# Allegro board Templet_16xB.brd
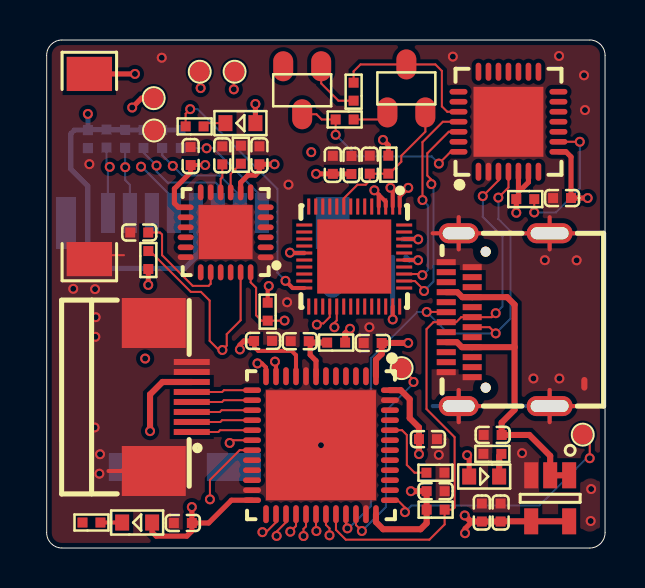
[diagram p0: board, top side]
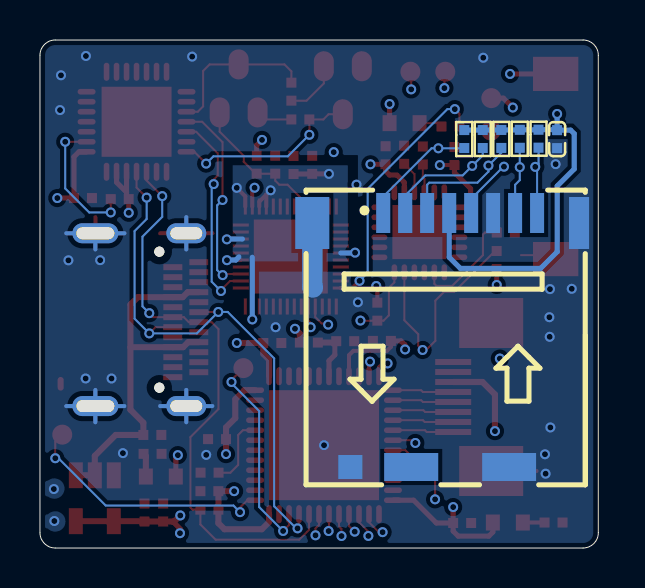
[diagram p1: board, bottom side, seen from below]

Outline 27.94 x 25.4 mm; copper layers: TOP, 3V3, GND, BOTTOM. Coordinates in mm from the lower left corner of the outline.
Outline path: 0,24.64 0,0.76 arc(0.22,0.22) 0.76,0 27.18,0 arc(27.72,0.22) 27.94,0.76 27.94,24.64 arc(27.72,25.18) 27.18,25.4 0.76,25.4 arc(0.22,25.18) 0,24.64

## Placement (name value [footprint] x y rotation side)
C1  0.1uf  [C0402]  21.77 1.77 90 top
C2  0.1uf  [C0402]  22.32 5.65 180 top
C3  10uf  [C0402]  22.71 1.77 90 top
C4  1uF  [C0402]  14.32 19.16 90 top
C5  0.1uf  [C0402]  15.25 19.15 90 top
C6  0.1uf  [C0402]  25.79 17.5 0 top
C7  0.1uf  [C0402]  16.17 19.17 90 top
C8  0.1uf  [C0402]  19.46 2.84 0 top
C9  0.1uf  [C0402]  10.83 10.35 0 top
C10  0.1uf  [C0402]  6.81 1.25 180 top
C11  0.1uf  [C0402]  16.31 10.25 180 top
C12  0.1uf  [C0402]  19.08 5.44 0 top
C13  2.2uF  [C0402]  4.63 15.77 0 top
C14  0.1uf  [C0402]  10.64 19.64 90 top
C15  0.1uf  [C0402]  12.66 10.34 180 top
C16  10nF  [C0402]  7.2 19.6 90 top
C17  0.1uf  [C0402]  8.79 19.63 90 top
C18  0.1uf  [C0402]  2.06 20.44 90 bottom
D1  LED  [LED0603]  9.69 21.24 180 top
D2  LED  [LED0603]  4.53 1.27 180 top
D3  LED  [LED0603]  21.89 3.57 0 top
J1  ANT  [ANT-SMD_L9_5-W2_1]  2.14 19.07 270 top
J2  HEADER 10  [FPC-SMD_KH-FG0_5-H2_0-8PIN]  6.31 7.55 90 top
J3  HEADER 1  [TPC_1R00]  9.4 23.81 0 top
J4  HEADER 1  [TPC_1R00]  7.66 23.81 0 top
J5  HEADER 1  [TPC_1R00]  26.82 5.67 0 top
J6  HEADER 1  [TPC_1R00]  17.76 8.99 0 top
J7  HEADER 1  [TPC_1R00]  5.36 22.49 0 top
J8  HEADER 1  [TPC_1R00]  5.37 20.87 0 top
Q1  NPN BCE  [SOT23_3L]  18 22.98 0 top
Q2  NPN BCE  [SOT23_3L]  12.79 22.89 180 top
R1  10K  [R0402]  17.1 19.17 270 top
R2  10K  [R0402]  23.95 17.44 0 top
R3  10K  [R0402]  14.91 21.43 0 top
R4  200R  [R0402]  7.4 21.08 180 top
R5  10K  [R0402]  15.36 22.82 270 top
R6  200R  [R0402]  2.24 1.27 180 top
R7  200R  [R0402]  22.3 4.71 180 top
R8  10K  [R0402]  19.45 3.76 0 top
R9  4.7K  [R0402]  5.09 14.4 90 top
R10  4.7K  [R0402]  11.06 11.82 270 top
R11  4.7K  [R0402]  19.46 1.92 180 top
R12  10K  [R0402]  14.48 10.27 180 top
R13  4.7K  [R0402]  9.72 19.66 90 top
R14  4.7K  [R0402]  6.71 20.45 90 bottom
R15  4.7K  [R0402]  5.78 20.45 90 bottom
R16  4.7K  [R0402]  4.85 20.45 90 bottom
R17  4.7K  [R0402]  3.93 20.46 90 bottom
R18  4.7K  [R0402]  2.99 20.47 90 bottom
U1  -  [SOT23-5]  25.2 2.48 180 top
U2  type-c-24p  [USB-C-SMD_TYPE-C-24P-QT]  22.58 11.42 90 top
U3  cp2102  [QFN-28_L5_0-W5_0-P0_50-BL-EP]  23.11 21.31 0 top
U4  ESP32-DOWD  [QFN-48_L5_0-W5_0-P0_35-BL-EP3_7]  15.39 14.57 180 top
U5  STM32F411xD/Exx UFQFPN48  [UFQFPN-48_L7_0-W7_0-P0_50-BL-EP]  13.73 5.14 180 top
U6  MPU6050  [QFN-24_L4_0-W4_0-P0_50-BL-EP2_7]  8.96 15.78 90 top
U7  TF/MicroSD  [TF-SMD_DM3CS-SF]  7.64 10.4 0 bottom

## Library data of the parts
C1-C12 = CAP NP: signal model: CAP_0402_1.01UF_16V_C0402_100NF_100nF
C13-C18 = CAP NP
D1-D3 = LED
J1 = HEADER 2
J2 = HEADER 10
J3-J8 = HEADER 1
Q1 Q2 = NPN BCE
R1-R18 = R
U1 = SOT23-5
U2 = type-c-24p
U3 = cp2102
U4 = ESP32-DOWD
U5 = STM32F401xD/Exx UFQFPN48
U6 = MPU6050
U7 = TF/MicroSD

## Footprints (pads in the part's own frame, mm; a bottom-side part is the same pattern mirrored in y, then rotated)
ANT-SMD_L9_5-W2_1
  rect 1.71x2.268 smd: 1(-4.63,0) 2(4.63,0)
C0402
  rect 0.5x0.5 smd: 1(-0.45,0) 2(0.45,0)
FPC-SMD_KH-FG0_5-H2_0-8PIN
  rect 0.3x1.8 smd: 1(-1.75,-0.95) 2(-1.25,-0.95) 3(-0.75,-0.95) 4(-0.25,-0.95) 5(0.25,-0.95) 6(0.75,-0.95) 7(1.25,-0.95) 8(1.75,-0.95)
  rect 2.5x3.2 smd: 9(3.7,0.95) 10(-3.7,0.95)
LED0603
  rect 0.7x0.8 smd: 1(-0.75,0) 2(0.75,0)
QFN-24_L4_0-W4_0-P0_50-BL-EP2_7
  oval 0.28x0.8 smd: 1(-1.25,-2) 2(-0.75,-2) 3(-0.25,-2) 4(0.25,-2) 5(0.75,-2) 6(1.25,-2) 13(1.25,2) 14(0.75,2) 15(0.25,2) 16(-0.25,2) 17(-0.75,2) 18(-1.242,2)
  oval 0.8x0.28 smd: 7(2,-1.25) 8(2,-0.75) 9(2,-0.25) 10(2,0.25) 11(2,0.75) 12(2,1.25) 19(-2,1.25) 20(-2,0.75) 21(-2,0.25) 22(-2,-0.25) 23(-2,-0.75) 24(-2,-1.25)
  rect 2.7x2.7 smd: 25(0.012,0)
QFN-28_L5_0-W5_0-P0_50-BL-EP
  oval 0.28x0.9 smd: 1(-1.501,-2.5) 2(-1.001,-2.5) 3(-0.5,-2.5) 4(0,-2.5) 5(0.5,-2.5) 6(1.001,-2.5) 7(1.501,-2.5) 15(1.501,2.5) 16(1.001,2.5) 17(0.5,2.5) 18(0,2.5) 19(-0.5,2.5) 20(-1.001,2.5) 21(-1.501,2.5)
  oval 0.9x0.28 smd: 8(2.5,-1.501) 9(2.5,-1.001) 10(2.5,-0.5) 11(2.5,0) 12(2.5,0.5) 13(2.5,1.001) 14(2.5,1.501) 22(-2.5,1.501) 23(-2.5,1.001) 24(-2.5,0.5) 25(-2.5,0) 26(-2.5,-0.5) 27(-2.5,-1.001) 28(-2.5,-1.501)
  rect 3.5x3.5 smd: 29(0,0)
QFN-48_L5_0-W5_0-P0_35-BL-EP3_7
  rect 0.15x0.8 smd: 1(-2.275,-2.5) 2(-1.925,-2.5) 3(-1.575,-2.5) 4(-1.225,-2.5) 5(-0.875,-2.5) 6(-0.525,-2.5) 7(-0.175,-2.5) 8(0.175,-2.5) 9(0.525,-2.5) 10(0.875,-2.5) 11(1.225,-2.5) 12(1.575,-2.5) 13(1.925,-2.5) 14(2.275,-2.5) 25(2.275,2.5) 26(1.925,2.5) 27(1.575,2.5) 28(1.225,2.5) 29(0.875,2.5) 30(0.525,2.5) 31(0.175,2.5) 32(-0.175,2.5) 33(-0.525,2.5) 34(-0.875,2.5) 35(-1.225,2.5) 36(-1.575,2.5) 37(-1.925,2.5) 38(-2.275,2.5)
  rect 0.8x0.15 smd: 15(2.5,-1.575) 16(2.5,-1.225) 17(2.5,-0.875) 18(2.5,-0.525) 19(2.5,-0.175) 20(2.5,0.175) 21(2.5,0.525) 22(2.5,0.875) 23(2.5,1.225) 24(2.5,1.575) 39(-2.5,1.575) 40(-2.5,1.225) 41(-2.5,0.875) 42(-2.5,0.525) 43(-2.5,0.175) 44(-2.5,-0.175) 45(-2.5,-0.525) 46(-2.5,-0.875) 47(-2.5,-1.225) 48(-2.5,-1.575)
  rect 3.7x3.7 smd: 49(0,0)
R0402
  rect 0.5x0.5 smd: 1(-0.45,0) 2(0.45,0)
SOT23-5
  rect 0.7x1.3 smd: 1(-0.95,-1.15) 2(0,-1.15) 3(0.95,-1.15) 4(0.95,1.15) 5(-0.95,1.15)
SOT23_3L
  oval 1x1.5 smd: 1(-0.95,-1.2) 2(0.95,-1.2) 3(0,1.2)
TF-SMD_DM3CS-SF
  rect 0.7x2 smd: 1(3.125,-6.35) 2(2.025,-6.35) 3(0.925,-6.35) 4(-0.177,-6.35) 5(-1.275,-6.35) 6(-2.375,-6.35) 7(-3.475,-6.35) 8(-4.575,-6.35)
  rect 2.7x1.4 smd: 9(1.724,6.35) 12(-3.176,6.35)
  rect 1.7x2.6 smd: 10(6.675,-5.851)
  rect 1x2.6 smd: 11(-6.675,-5.851)
  rect 1.2x1.2 smd: 13(4.775,6.35)
TPC_1R00
  round 1 smd: 1(0,0)
UFQFPN-48_L7_0-W7_0-P0_50-BL-EP
  oval 0.28x0.9 smd: 1(-2.751,-3.449) 2(-2.25,-3.449) 3(-1.75,-3.449) 4(-1.249,-3.449) 5(-0.749,-3.449) 6(-0.249,-3.449) 7(0.249,-3.449) 8(0.75,-3.449) 9(1.25,-3.449) 10(1.75,-3.449) 11(2.251,-3.449) 12(2.751,-3.449) 25(2.751,3.449) 26(2.251,3.449) 27(1.75,3.449) 28(1.25,3.449) 29(0.75,3.449) 30(0.249,3.449) 31(-0.249,3.449) 32(-0.749,3.449) 33(-1.249,3.449) 34(-1.75,3.449) 35(-2.25,3.449) 36(-2.751,3.449)
  oval 0.9x0.28 smd: 13(3.45,-2.751) 14(3.45,-2.25) 15(3.45,-1.75) 16(3.45,-1.25) 17(3.45,-0.749) 18(3.45,-0.249) 19(3.45,0.249) 20(3.45,0.749) 21(3.45,1.25) 22(3.45,1.75) 23(3.45,2.25) 24(3.45,2.751) 37(-3.449,2.751) 38(-3.449,2.25) 39(-3.449,1.75) 40(-3.449,1.25) 41(-3.449,0.749) 42(-3.449,0.249) 43(-3.449,-0.249) 44(-3.449,-0.749) 45(-3.449,-1.25) 46(-3.449,-1.75) 47(-3.449,-2.25) 48(-3.449,-2.751)
  rect 5.5x5.5 smd: 49(0,0)
USB-C-SMD_TYPE-C-24P-QT
  round 0.5 hole 0.5: (-3.4,0.613) (3.4,0.613)
  oval 1x2 hole 0.6x1.6: 1(-4.32,1.962) 2(4.32,1.962)
  oval 1x2.3 hole 0.6x1.9: 3(4.32,-2.587) 4(-4.32,-2.587)
  rect 0.3x0.95 smd: A1(-2.625,2.587) A2(-2.125,2.587) A3(-1.625,2.587) A4(-1.125,2.587) A5(-0.625,2.587) A6(-0.125,2.587) A7(0.375,2.587) A8(0.875,2.587) A9(1.375,2.587) A10(1.875,2.587) A11(2.375,2.587) A12(2.875,2.587) B1(2.625,1.288) B2(2.125,1.288) B3(1.625,1.288) B4(1.125,1.288) B5(0.625,1.288) B6(0.125,1.288) B7(-0.375,1.288) B8(-0.875,1.288) B9(-1.375,1.288) B10(-1.875,1.288) B11(-2.375,1.288) B12(-2.875,1.288)

## Nets
3V3: C1.1 C3.1 C4.1 C5.1 C6.2 C8.1 C9.1 C10.1 C11.1 C12.1 C14.1 C16.1 C18.2 D1.1(+) D2.1(+) D3.1(+) J2.6 J7.1 R1.1 R2.1 R9.1 R10.1 R11.2 R12.1 R14.2 R15.2 R16.2 R17.2 R18.2 U1.4(OUT) U1.5(FB) U3.5(D-) U3.6(VDD) U3.8(VBUS) U4.1(VDDA#1) U4.3(VDD3P3#3) U4.4(VDD3P3#4) U4.19(VDD3P3_RTC) U4.37(VDD3P3_CPU) U4.43(VDDA#43) U4.46(VDDA#46) U5.1(VBAT) U5.9(VDDA/VREF+) U5.24(VDD#24) U5.36(VDD#36) U5.48(VDD#48) U6.8(VLOGIC) U6.13(VDD) U7.4(VDD)
GND: C1.2 C2.2 C3.2 C4.2 C5.2 C6.1 C7.2 C8.2 C9.2 C10.2 C11.2 C12.2 C13.1 C14.2 C15.2 C16.2 C17.2 C18.1 J1.2 J2.7 J2.8 J2.9 J2.10 J8.1 R7.2 R8.2 R13.2 U1.3(GND) U2.1(EP#1) U2.2(EP#2) U2.3(EP#3) U2.4(EP#4) U2.A1(GND#A1) U2.A12(GND#A12) U2.B1(GND#B1) U2.B12(GND#B12) U3.2(RI) U3.29(HEAT_TAB) U5.8(VSSA/VREF-) U5.23(VSS#23) U5.35(VSS#35) U5.47(VSS#47) U5.49(GND) U6.1(CLKIN) U6.11(FSYNC) U6.18(GND#18) U6.25(GND#25) U7.6(VSS) U7.10 U7.11 U7.12 U7.13
VDD_5V: C2.1 U1.1(IN) U1.2(EN) U2.A4(VBUS#A4) U2.A9(VBUS#A9) U2.B4(VBUS#B4) U2.B9(VBUS#B9)
BLK: J2.1 U5.17(PA7)
CC1: U2.A5(CC1)
CC2: U2.B5(CC2)
DC: J2.2 U5.16(PA6)
DTR: Q2.3(E) R3.1 U3.28(DTR)
E32_IO4: R4.2 U4.24(GPIO4)
E32_U0RXD: U3.26(TXD) U4.40(U0RXD)
E32_U0TXD: U3.25(RXD) U4.41(U0TXD)
E32_U1RXD: J4.1 U4.28(SD_DATA_2) U5.12(PA2)
E32_U1TXD: J3.1 U4.29(SD_DATA_3) U5.11(PA1)
EN: C7.1 Q1.2(C) R1.2 U4.9(CHIP_PU)
GPIO0: Q2.2(C)
MPU_SCL: R9.2 U5.19(PB1) U6.23(SCL)
MPU_SDA: R10.2 U5.18(PB0) U6.24(SDA)
RES: J2.3 U5.15(PA5)
RESV1: U6.22(RESV1)
RESV2: U6.21(RESV2)
RESV3: U6.19(RESV3)
RTS: Q1.3(E) R5.1 U3.24(RTS)
RX1+: U2.B11(RX1+)
RX1-: U2.B10(RX1-)
RX2+: U2.A11(RX2+)
RX2-: U2.A10(RX2-)
SCL: J2.5 U5.13(PA3)
SDA: J2.4 U5.14(PA4)
SDIO_CLK: U5.28(PB15) U7.5(CLK)
SDIO_CMD: R16.1 U5.29(PA8) U7.3(CMD)
SDIO_D0: R17.1 U5.27(PB14) U7.7(DATA0)
SDIO_D1: R18.1 U5.26(PB13) U7.8(DATA1)
SDIO_D2: R14.1 U5.31(PA10) U7.1(DAT2)
SDIO_D3: R15.1 U5.30(PA9) U7.2(DATA3/CD)
ST_PA14: R6.2
ST_SWCLK: J5.1 U5.37(PA14)
ST_SWDIO: J6.1 U5.34(PA13)
SUB1: U2.A8(SUB1)
SUB2: U2.B8(SUB2)
TX1+: U2.A2(TX1+)
TX1-: U2.A3(TX1-)
TX2+: U2.B2(TX2+)
TX2-: U2.B3(TX2-)
USB-D+: U2.A7(D-#A7) U2.B7(D-#B7) U3.4(D+) U5.33(PA12)
USB-D-: R11.1 U2.A6(D+#A6) U2.B6(D+#B6) U3.3(GND) U5.32(PA11)
N05093: R2.2 U3.9(RST)
N06006: J1.1 U4.2(LAN_IN)
N16435: Q1.1(B) R3.2
N16447: Q2.1(B) R5.2
N22150: C15.1 R12.2 U5.7(NRST)
N26946: C13.2 U6.20(CPOUT)
N28132: C17.1 U6.10(REGOUT)
N29778: R13.1 U6.9(AD0)
N53835: D1.2(-) R4.1
N53839: D2.2(-) R6.1
N53846: D3.2(-) R7.1
N101946: R8.1 U5.44(BOOT0)

Pads without a net: U3 1 7 10 11 12 13 14 15 16 17 18 19 20 21 22 23 27; U4 5 6 7 8 10 11 12 13 14 15 16 17 18 20 21 22 23 25 26 27 30 31 32 33 34 35 36 38 39 42 44 45 47 48 49; U5 2 3 4 5 6 10 20 21 22 25 38 39 40 41 42 43 45 46; U6 2 3 4 5 6 7 12 14 15 16 17; U7 9

## Via types
v1: diameter 0.5, hole 0.3, TOP to BOTTOM, 98 vias

## Routing (per net, layer and track width the routed paths; a pad name or vN(x,y) marks a point on that pad's centre or on a via; arc(x,y) is an arc through that point)
3V3: length 88.5
  TOP w0.203: U4.1 17.67,17.58 v1(18.09,18.01) ; 16.62,17.67 v1(16.4,17.88) ; 16.62,17.67 U4.4 ; 16.62,17.67 16.97,17.32 U4.3 ; C9.1 10.38,10.06 10.58,9.86 12.26,9.86 12.48,9.64 U5.9 ; R10.1 11.06,13.05 v1(11.11,13.1) ; U4.19 12.19,14.75 v1(12.17,14.77) ; C16.1 v1(7.93,19.15) ; v1(18.58,14.39) 18.58,14.4 U4.43 ; U4.46 18.57,15.45 v1(18.59,15.43) ; U4.37 v1(17.32,11.43)
  TOP w0.254: 23.61,17.79 U3.5 ; 23.61,17.79 23.61,17.55 R2.1 v1(23.5,16.76) ; 23.61,17.79 24.11,18.29 U3.6 ; v1(11.4,19.19) C14.1 10.64,18.85 10.44,18.64 10.08,18.64 9.71,18.27 U6.8 ; D2.1 5.28,0.8 5.48,0.59 7.01,0.59 7.26,0.84 C10.1 ; v1(21.04,4.64) 21.14,4.54 D3.1 ; D1.1 v1(10.44,22.2) ; C10.1 8.11,1.25 9.24,2.39 U5.24 ; C10.1 v1(7.26,2.05) ; v1(27.07,17.5) C6.2 26.24,19.56 25.98,19.81 U3.8 ; 21.29,1.32 20.93,0.97 v1(20.93,0.74) ; v1(9.67,9.93) 9.67,10.15 9.87,10.35 C9.1 ; C16.1 7.2,18.78 6.39,17.97 6.39,17.24 6.59,17.03 U6.13 ; J7.1 4.75,22.49 v1(4.28,22.02) ; v1(16.83,20.41) 17.1,20.14 R1.1 ; v1(13.48,18.71) C4.1 14.33,18.7 C5.1 ; R9.1 5.09,13.16 v1(5.08,13.15)
  TOP w0.305: U5.1 16.48,9.42 16.76,9.71 C11.1 v1(18.09,10.25) ; v1(5.17,5.84) 5.17,7.68 5.8,8.3 J2.6 ; v1(18.63,4.69) C12.1 18.63,6.03 18.17,6.49 18.17,7.44 17.71,7.89 U5.48 ; v1(15.18,10.96) 14.93,10.72 R12.1 ; U5.36 16.48,1.3 16.84,0.94 18.71,0.94 19.01,1.24 R11.2 19.01,1.92 C8.1 v1(18.22,2.84) ; U1.5 U1.4 22.73,1.33 C3.1 C1.1 21.22,1.32 v1(20.92,1.63)
  BOTTOM w0.203: 17.31,14.54 17.32,14.54 ; 17.8,15.44 17.81,15.45 ; 12.89,14.75 12.88,14.75
  BOTTOM w0.254: R14.2 5.79,20.9 R15.2 4.86,20.9 R16.2 3.94,20.9 R17.2 3,20.91 R18.2 2.08,20.92 C18.2 ; 12.88,14.75 12.19,14.75 v1(12.17,14.77) ; v1(18.58,14.39) 18.58,14.4 18.14,14.4 17.98,14.56 ; C18.2 1.39,20.89 1.21,20.71 1.21,18.95 2.06,18.1 2.06,14.81 2.89,13.98 6.9,13.98 7.46,14.54 U7.4 ; C18.2 v1(2.06,21.7) ; 17.81,15.45 18.57,15.45 v1(18.59,15.43) ; 17.32,14.54 v1(17.32,11.43)
  vias: v1(4.93,9.47) v1(13.24,19.79)
GND: length 55
  TOP w0.102: 3.87,14.64 2.14,14.64 2.09,14.69
  TOP w0.203: 19.31,15.74 U2.2 ; U2.2 20.62,14.93 ; U2.2 20.62,16.54 ; U2.2 21.92,15.74 ; U2.3 25.17,16.54 ; U2.3 25.17,14.93 ; U2.3 23.71,15.74 ; U2.3 26.62,15.74 ; 20.62,6.29 U2.1 ; U2.1 20.62,7.9 ; U2.1 21.92,7.1 ; 25.17,6.29 U2.4 ; U2.4 25.17,7.9 ; U2.4 26.62,7.1 ; v1(19.62,4.66) 19.6,4.66 19.53,4.72 ; 3.09,3.85 J2.10
  TOP w0.305: 26.9,8.02 26.9,8.4
  GND w0.203: 20.62,6.29 U2.1 ; U2.1 21.92,7.1 ; U2.1 19.31,7.1 ; U2.1 20.62,7.9 ; 25.17,6.29 U2.4 ; U2.4 25.17,7.9 ; U2.4 23.71,7.1 ; U2.4 26.62,7.1 ; 19.31,15.74 U2.2 ; U2.2 20.62,14.93 ; U2.2 20.62,16.54 ; U2.2 21.92,15.74 ; U2.3 26.62,15.74 ; U2.3 25.17,16.54 ; U2.3 25.17,14.93 ; U2.3 23.71,15.74
  BOTTOM w0.203: 20.62,6.29 U2.1 ; U2.1 21.92,7.1 ; U2.1 20.62,7.9 ; U2.1 19.31,7.1 ; U2.4 25.17,7.9 ; U2.4 23.71,7.1 ; U2.4 26.62,7.1 ; U2.4 25.17,6.29 ; 20.62,14.93 U2.2 20.62,16.54 ; 25.17,14.93 U2.3 ; U2.3 26.62,15.74 ; U2.3 23.71,15.74 ; 5.26,15.86 5.26,15.87
  BOTTOM w0.254: 5.26,15.87 U7.6
  BOTTOM w1.016: 14.28,13.02 14.31,13.05 U7.10
  vias: v1(1.33,12.96) v1(2.14,19.19) v1(2.42,12.94) v1(2.45,11.54) v1(2.43,10.56) v1(2.4,6.03) v1(2.64,3.72) v1(2.67,4.69) v1(5.76,24.51) v1(12.03,12.29) v1(12.1,18.17) v1(13.73,5.14) v1(16.15,11.04) v1(20.33,24.57) v1(23.79,4.74) v1(24.36,8.48) v1(24.93,14.39) v1(25.64,24.6) v1(25.66,8.48) v1(26.52,14.38) v1(26.89,23.64) v1(26.94,21.9) v1(27.25,2.95) v1(27.22,1.35)
VDD_5V: length 18.8
  TOP w0.305: 23.41,10.04 23.41,6.91 22.77,6.27 C2.1 24.15,5.65 25.2,4.61 U1.2 U1.1 ; 23.41,10.04 U2.B9 20.77,10.04 20.52,10.29 U2.A4 ; 23.41,10.04 23.41,12.17 23.04,12.54 U2.B4 20.8,12.54 20.55,12.79 U2.A9
BLK: length 3.1
  TOP w0.102: J2.1 8.59,5.8 8.68,5.89 U5.17
DC: length 3.1
  TOP w0.102: J2.2 8.69,6.3 8.78,6.39 U5.16
DTR: length 9.5
  TOP w0.102: v1(19.63,19.22) 20.22,19.81 U3.28 ; v1(14.46,20.66) R3.1 13.76,21.43 13.5,21.69 Q2.3
  BOTTOM w0.102: v1(19.63,19.22) 19.26,19.58 15.54,19.58 v1(14.46,20.66)
E32_IO4: length 12.8
  TOP w0.102: R4.2 6.95,21.72 v1(7.18,21.94)
  TOP w0.203: v1(11.95,13.36) 12.31,13 U4.24
  BOTTOM w0.102: v1(7.18,21.94) 7.55,21.94 11.54,17.96 11.54,13.77 v1(11.95,13.36)
E32_U0RXD: length 10.4
  TOP w0.102: v1(18.88,12.85) 18.87,12.86 18.87,12.9 18.43,13.35 U4.40 ; v1(19.25,18.2) 19.25,18.42 19.05,18.62 19.05,19.74 20.12,20.81 U3.26
  BOTTOM w0.102: v1(18.88,12.85) 19.35,13.31 19.35,18.1 v1(19.25,18.2)
E32_U0TXD: length 10
  TOP w0.102: U4.41 18.72,13.7 18.77,13.64 v1(18.8,13.64) ; U3.25 19.82,21.31 18.81,20.29 v1(18.81,17.4)
  BOTTOM w0.102: v1(18.8,13.64) 18.82,13.64 19.07,13.9 19.07,17.13 v1(18.81,17.4)
E32_U1RXD: length 21.2
  TOP w0.102: J4.1 7.7,23.77 v1(7.7,23) ; v1(13.52,11.17) 13.58,11.23 13.85,11.23 14.17,11.55 U4.28
  TOP w0.203: v1(10.55,9.23) 10.77,9.23 10.98,9.03 U5.12
  3V3 w0.102: v1(13.52,11.17) 13.52,16.1 8.05,21.57 8.05,22.65 v1(7.7,23)
  GND w0.102: v1(13.52,11.17) 13.46,11.23 12.55,11.23 v1(10.55,9.23)
E32_U1TXD: length 20.4
  TOP w0.102: J3.1 9.36,23.77 v1(9.36,22.93) ; U4.29 14.52,11.38 14.4,11.26 v1(14.4,11.04)
  TOP w0.203: U5.11 11.48,9.27 v1(11.42,9.32)
  3V3 w0.102: v1(9.36,22.93) 9.36,22.16 12.26,19.26 12.26,18.68 14.19,16.75 14.19,11.25 v1(14.4,11.04)
  GND w0.102: v1(11.42,9.32) 11.47,9.28 12.63,9.28 v1(14.4,11.04)
EN: length 7.2
  TOP w0.102: U4.9 14.87,17.48 15.55,18.17 15.96,18.17 16.17,18.37 C7.1 17.1,18.71 R1.2 17.15,18.72 17.75,19.31 17.75,19.61 18.95,20.82 Q1.2
MPU_SCL: length 22.8
  TOP w0.102: v1(8.17,2.43) 8.17,3.4 9.66,4.89 U5.19 ; U6.23 9.71,11.39 9.01,10.69 9.01,10.12 v1(8.79,9.9) 8.61,9.9 8.16,10.36 8.16,12.37 7.72,12.81 7.21,12.81 5.27,14.75 5.17,14.85 R9.2
  3V3 w0.102: v1(8.79,9.9) 8.5,9.9 8.38,9.78 8.38,2.64 v1(8.17,2.43)
MPU_SDA: length 12.4
  TOP w0.102: v1(11.9,11.37) 11.9,11.37 R10.2 10.75,11.37 10.48,11.63 10.48,13.01 10.21,13.28 U6.24 ; v1(9.16,5.25) 9.2,5.25 9.34,5.39 U5.18
  GND w0.102: v1(11.9,11.37) 8.96,8.43 8.96,5.45 v1(9.16,5.25)
RES: length 3.1
  TOP w0.102: J2.3 8.67,6.8 8.76,6.89 U5.15
RTS: length 8
  TOP w0.102: U3.24 20.04,21.81 19.78,22.08 19.78,23.85 19.45,24.18 Q1.3 15.71,24.18 15.36,23.83 R5.1
SCL: length 3.1
  TOP w0.102: U5.13 8.87,7.89 8.78,7.8 J2.5
SDA: length 3.1
  TOP w0.102: U5.14 8.87,7.39 8.78,7.3 J2.4
SDIO_CLK: length 28.8
  TOP w0.102: U5.28 12.48,1.1 v1(12.19,0.82)
  GND w0.102: v1(4.72,19.06) 4.72,18.14 4.21,17.63 4.21,3.92 6.63,1.5 11.8,1.5 12.19,1.1 v1(12.19,0.82)
  BOTTOM w0.102: v1(4.72,19.06) 4.75,19.06 6.36,17.45 U7.5
SDIO_CMD: length 31
  TOP w0.102: U5.29 12.98,1.08 12.85,0.95 v1(12.85,0.6)
  GND w0.102: v1(5.5,19.12) 5.5,17.62 5.89,17.22 5.89,4.26 7.22,2.94 10.79,2.94 12.85,0.88 v1(12.85,0.6)
  BOTTOM w0.102: R16.1 4.85,19.76 v1(5.5,19.12) 5.5,18.82 6.05,18.27 8.46,18.27 8.56,18.16 U7.3
SDIO_D0: length 29.2
  TOP w0.102: v1(11.51,0.6) 11.51,0.82 11.98,1.29 U5.27
  GND w0.102: v1(11.51,0.6) 11.51,0.8 11.06,1.25 6.05,1.25 3.93,3.37 v1(3.93,19.04)
  BOTTOM w0.102: U7.7 4.16,18.16 3.93,18.39 v1(3.93,19.04) R17.1
SDIO_D1: length 29
  TOP w0.102: U5.26 11.48,1.29 10.98,0.79 v1(10.8,0.79)
  GND w0.102: v1(3.16,19.06) 3.16,3.47 5.69,0.93 10.66,0.93 v1(10.8,0.79)
  BOTTOM w0.102: U7.8 3.06,18.97 v1(3.16,19.06) 2.99,19.22 R18.1
SDIO_D2: length 32.7
  TOP w0.102: U5.31 13.98,1.16 14.15,0.98 v1(14.15,0.63)
  GND w0.102: v1(8,19.99) 8.51,19.48 8.51,18.67 6.79,16.96 6.79,4.07 7.41,3.45 11.41,3.45 14.15,0.71 v1(14.15,0.63)
  BOTTOM w0.102: R14.1 6.72,19.99 v1(8,19.99) 8.34,19.99 10.76,17.57 U7.1
SDIO_D3: length 30.3
  TOP w0.102: v1(13.5,0.85) 13.48,0.87 U5.30
  GND w0.102: v1(13.5,0.85) 11.12,3.22 7.23,3.22 6.41,4.04 6.41,17.51 6.31,17.62 v1(6.31,19.1)
  BOTTOM w0.102: U7.2 9.66,17.62 8.66,18.63 6.79,18.63 v1(6.31,19.1) 5.78,19.63 R15.1
ST_SWCLK: length 12.8
  TOP w0.102: U5.37 17.56,2.39 17.93,2.02 v1(17.93,1.79) ; v1(27.17,4.49) 27.17,5.32 J5.1
  BOTTOM w0.102: v1(17.93,1.79) 18.26,2.12 24.65,2.12 27.02,4.49 v1(27.17,4.49)
ST_SWDIO: length 10.4
  TOP w0.102: v1(15.77,0.85) 15.48,1.15 U5.34 ; J6.1 18.36,8.4 v1(18.36,8.3)
  BOTTOM w0.102: v1(18.36,8.3) 18.36,8.23 16.97,6.85 16.97,2.05 15.77,0.85 v1(15.77,0.85)
USB-D+: length 28.5
  TOP w0.102: U3.4 23.11,18.02 v1(22.6,17.52) ; v1(15.05,0.98) 14.98,1.06 U5.33 ; v1(22.47,10.73) 22.16,11.04 U2.B7 ; v1(19.02,11.8) 19.98,11.8 U2.A7
  BOTTOM w0.102: v1(15.05,0.98) 15.12,0.98 16.22,2.09 16.22,9.48 18.54,11.8 v1(19.02,11.8) 20.09,10.73 v1(22.47,10.73) 23.21,11.47 23.21,15.84 22.6,16.45 v1(22.6,17.52)
USB-D-: length 29.3
  TOP w0.102: U3.3 22.61,18.38 v1(21.82,17.59) ; v1(22.47,11.74) 22.27,11.54 U2.B6 20.74,11.54 20.49,11.29 U2.A6 19.35,11.29 19.01,10.95 19.01,6.94 20.41,5.54 20.41,2.02 20.31,1.92 R11.1 19.91,1.18 19.15,0.42 14.97,0.42 14.48,0.91 U5.32
  BOTTOM w0.102: v1(22.47,11.74) 22.81,12.08 22.81,15.57 21.82,16.56 v1(21.82,17.59)
N05093: length 6.8
  TOP w0.102: R2.2 v1(24.4,16.78) ; U3.9 v1(26.68,20.31)
  BOTTOM w0.102: v1(24.4,16.78) 25.48,16.78 26.68,17.98 v1(26.68,20.31)
N06006: length 18.5
  TOP w0.203: v1(17.2,18.01) 17.32,17.9 U4.2
  TOP w0.254: v1(4.42,23.7) 4.39,23.7 J1.1
  GND w0.102: v1(17.2,18.01) 15,20.21 13.85,20.21 10.27,23.79 4.5,23.79 v1(4.42,23.7)
N16435: length 1.8
  TOP w0.102: Q1.1 16.7,21.43 R3.2
N16447: length 2.8
  TOP w0.102: Q2.1 13.74,23.23 14.6,22.37 R5.2
N22150: length 2.8
  TOP w0.203: 13.18,10.27 C15.1
  TOP w0.254: 13.18,10.27 13.18,9.65 13.48,9.36 U5.7
  TOP w0.305: R12.2 13.18,10.27
N26946: length 5.4
  TOP w0.102: C13.2 5.67,15.77 5.77,15.67 5.77,14.64 7.31,13.11 8.1,13.11 8.21,13.21 U6.20
N28132: length 1.4
  TOP w0.102: C17.1 8.79,18.54 8.71,18.46 U6.10
N29778: length 1.6
  TOP w0.102: U6.9 9.21,18.7 R13.1
N53835: length 1.2
  TOP w0.102: R4.1 8.02,21.24 D1.2
N53839: length 1.1
  TOP w0.203: D2.2 R6.1
N53846: length 1.2
  TOP w0.305: D3.2 22.64,4.6 R7.1
N101946: length 3.6
  TOP w0.102: U5.44 17.78,5.89 18.02,5.65 18.02,4.15 18.41,3.76 R8.1

## Copper pours and planes (outline as drawn; the poured copper is in the pictures)
3V3 on BOTTOM: 12.54,19.14 12.54,14.32 18.3,14.32 18.3,19.14
3V3 on 3V3: 0.76,0.25 0.4,0.4 0.25,0.76 0.25,24.64 0.4,25 0.76,25.15 27.18,25.15 27.54,25 27.69,24.64 27.69,0.76 27.54,0.4 27.18,0.25 ; 1 cut-out
GND on TOP: 0.76,0.25 0.4,0.4 0.25,0.76 0.25,24.64 0.4,25 0.76,25.15 27.18,25.15 27.54,25 27.69,24.64 27.69,0.76 27.54,0.4 27.18,0.25 ; 10 cut-outs
GND on BOTTOM: 0.76,0.25 0.4,0.4 0.25,0.76 0.25,24.64 0.4,25 0.76,25.15 27.18,25.15 27.54,25 27.69,24.64 27.69,0.76 27.54,0.4 27.18,0.25 ; 6 cut-outs
GND on GND: 0.76,0.25 0.4,0.4 0.25,0.76 0.25,24.64 0.4,25 0.76,25.15 27.18,25.15 27.54,25 27.69,24.64 27.69,0.76 27.54,0.4 27.18,0.25 ; 7 cut-outs

## Text on the board
XSECTION_CHART: *  SURFACE - AIR 0 MIL | L1: TOP CONDUCTOR - COPPER 1.38 MIL | *  DIELECTRIC - FR-4 4.8 MIL | L2: 3V3 CONDUCTOR - COPPER 1.38 MIL | *  DIELECTRIC - FR-4 45.28 MIL | L3: GND CONDUCTOR - COPPER 1.38 MIL | L4: BOTTOM CONDUCTOR - COPPER 1.38 MIL | DESIGN CROSS SECTION CHART | ___________________________ | TOTAL THICKNESS 60.4 MIL | 1-4
User.17: FIGURE | SIZE | 11.81 | 19.69 | 62.99x23.62 | 74.8x23.62 | DRILL CHART: TOP to BOTTOM | ALL UNITS ARE IN MILS | PLATED | QTY | 98 | 2
